# Altium PCB TG21_TX_Ma tran phim.PcbDoc (part 2 of 3)
Units mm, origin at the board's own origin, x right, y up, seen from the top; angles counter-clockwise.
Board outline 300 x 226.6 mm, 2 copper layers (Top Layer, Bottom Layer), stack 1.581 mm thick; 245 components, 229 nets, 914 pads, 4790 vias.
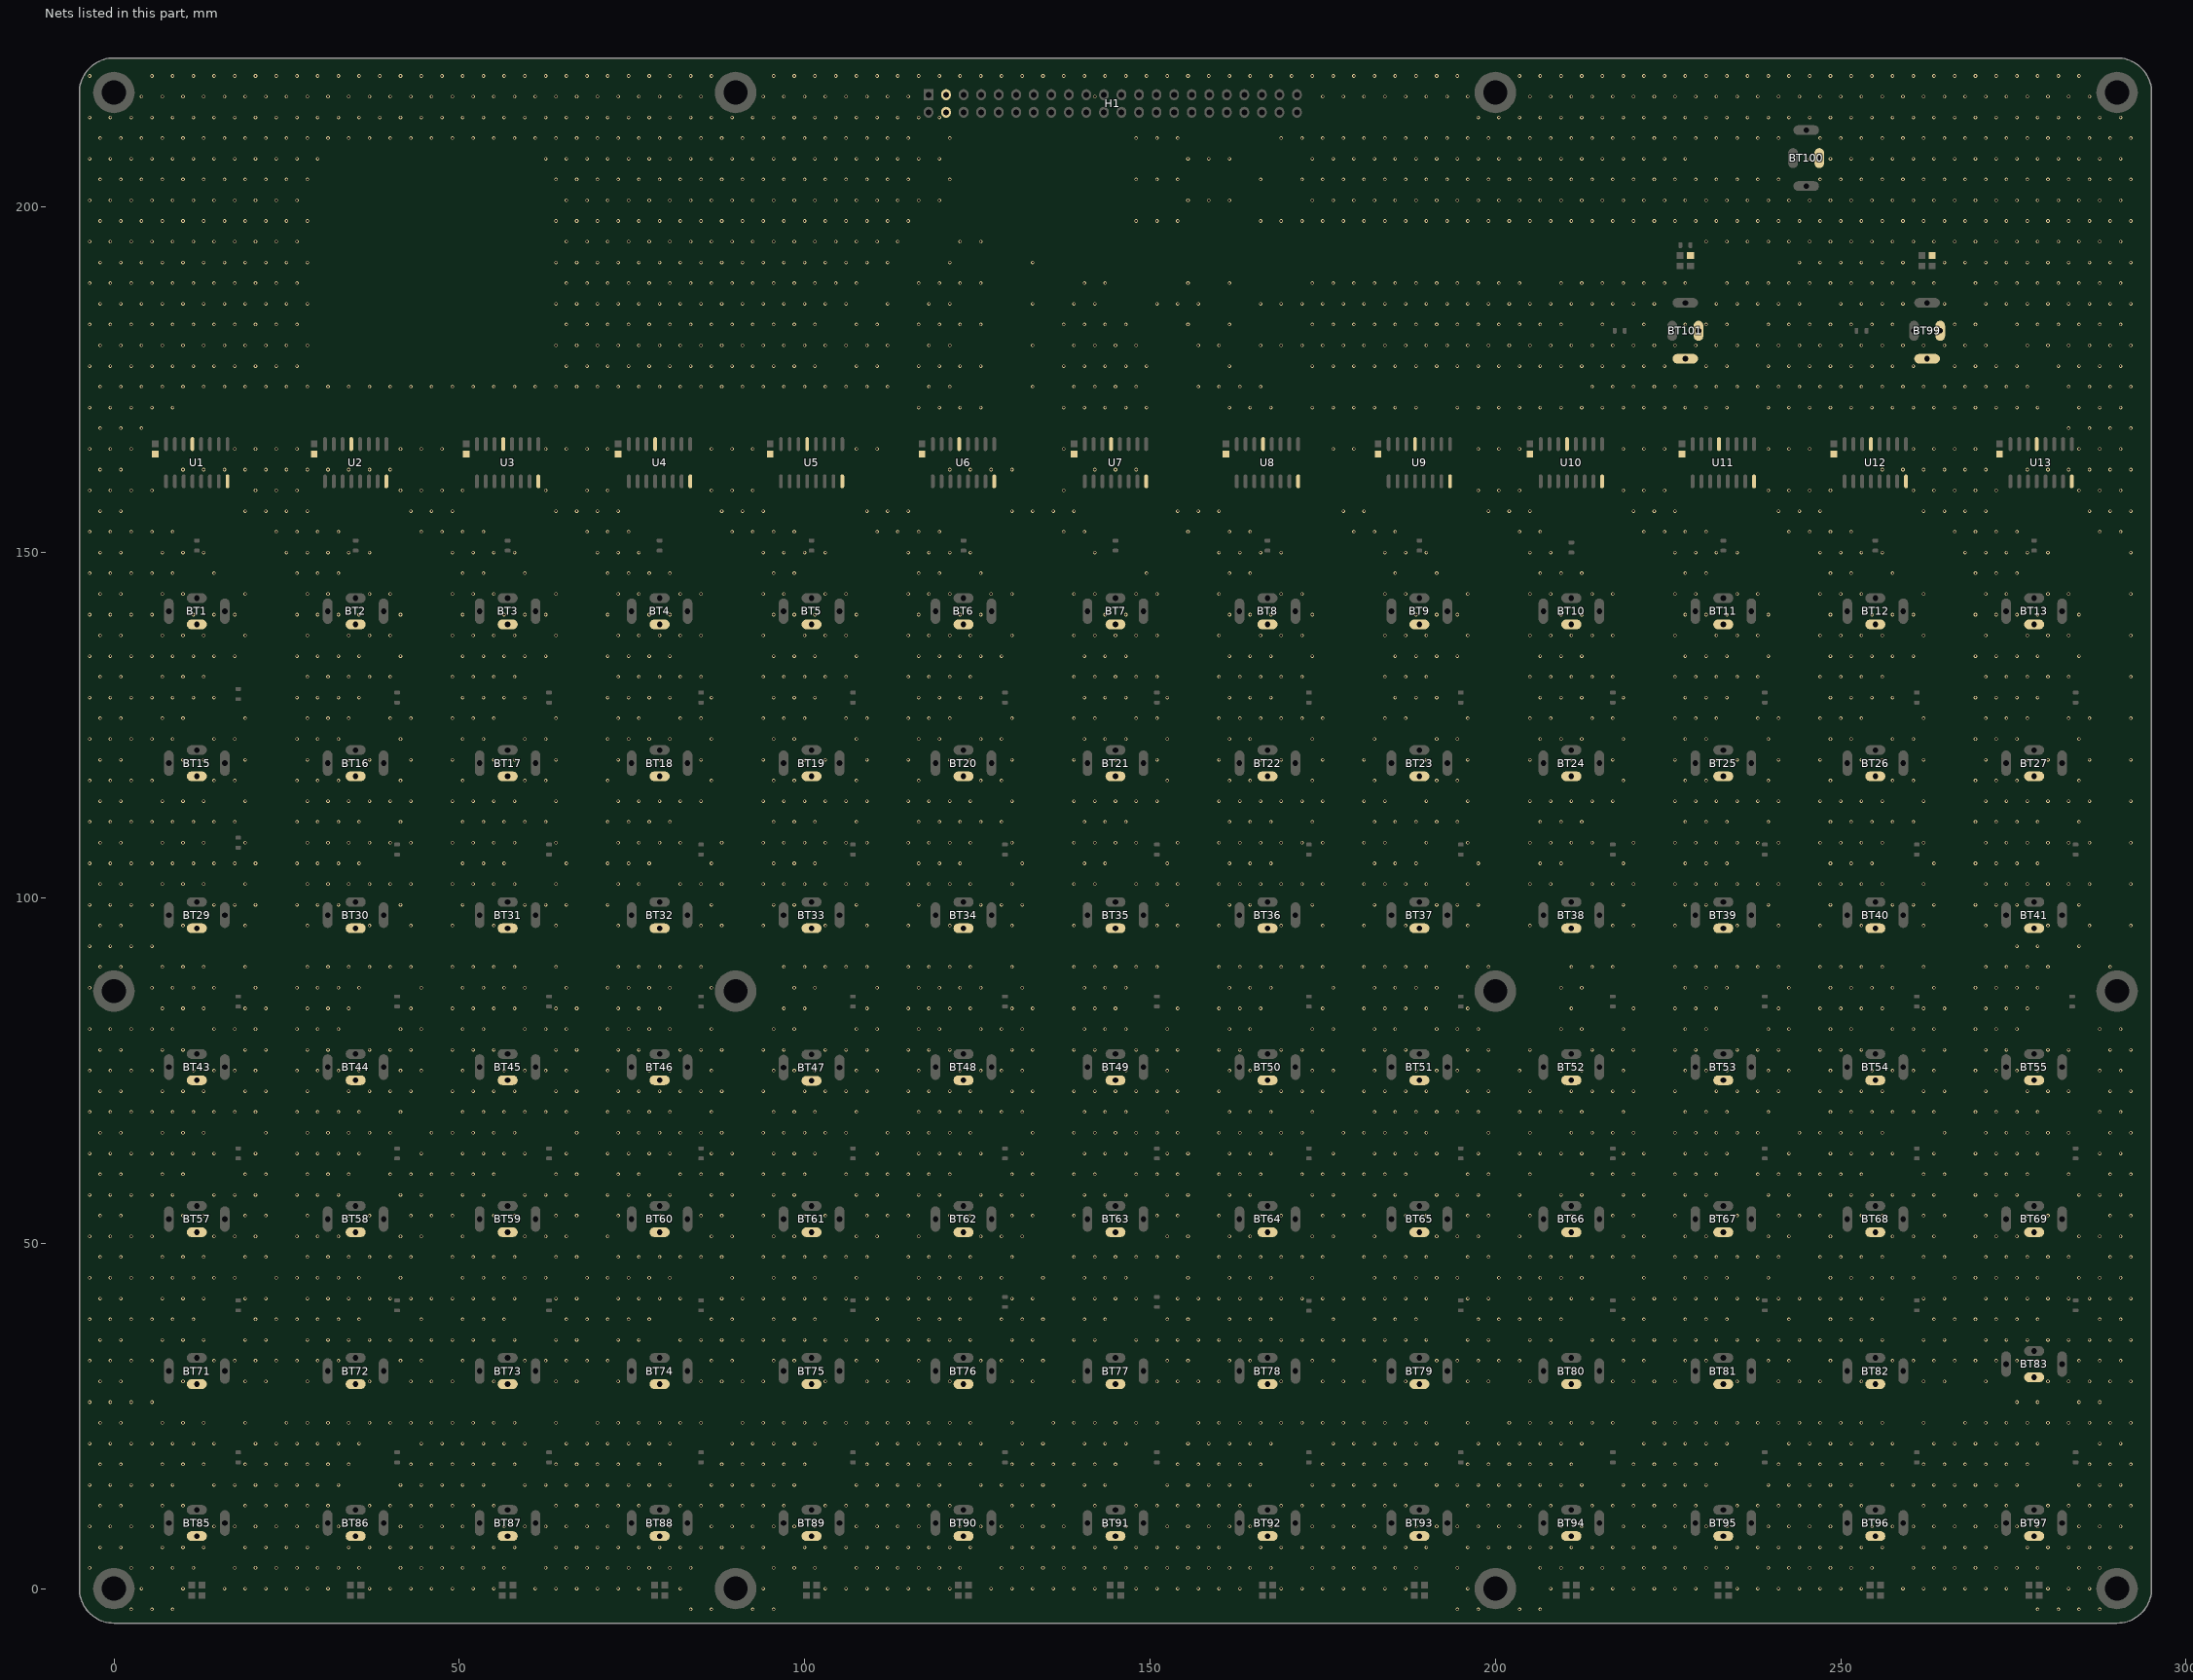
[diagram p2: the nets of this part, all layers, seen from the top]

## Via types
v1: diameter 0.5, hole 0.3, Top Layer to Bottom Layer, tented both sides, 4788 vias
v2: diameter 1.27, hole 0.711, Top Layer to Bottom Layer, tented both sides, 2 vias

## Nets (pads, with @x,y where several pads share a name; then routed paths per layer and width w, separated by ;. In a path a pad name is that pad's centre, name@x,y a point inside that pad or via, vN(x,y) a via of type N, cw(c..) or ccw(c..) an arc to the next point about the centre after c; other vN are vias at no path point) (continued)
GND: BT1.4 BT2.4 BT3.4 BT4.4 BT5.4 BT6.4 BT7.4 BT8.4 BT9.4 BT10.4 BT11.4 BT12.4 BT13.4 BT15.4 BT16.4 BT17.4 BT18.4 BT19.4 BT20.4 BT21.4 BT22.4 BT23.4 BT24.4 BT25.4 BT26.4 BT27.4 BT29.4 BT30.4 BT31.4 BT32.4 BT33.4 BT34.4 BT35.4 BT36.4 BT37.4 BT38.4 BT39.4 BT40.4 BT41.4 BT43.4 BT44.4 BT45.4 BT46.4 BT47.4 BT48.4 BT49.4 BT50.4 BT51.4 BT52.4 BT53.4 BT54.4 BT55.4 BT57.4 BT58.4 BT59.4 BT60.4 BT61.4 BT62.4 BT63.4 BT64.4 BT65.4 BT66.4 BT67.4 BT68.4 BT69.4 BT71.4 BT72.4 BT73.4 BT74.4 BT75.4 BT76.4 BT77.4 BT78.4 BT79.4 BT80.4 BT81.4 BT82.4 BT83.4 BT85.4 BT86.4 BT87.4 BT88.4 BT89.4 BT90.4 BT91.4 BT92.4 BT93.4 BT94.4 BT95.4 BT96.4 BT97.4 BT99.2 BT99.4 BT100.4 BT101.2 BT101.4 C1.1 C2.1 C3.1 C4.1 C5.1 C6.1 C7.1 C8.1 C9.1 C10.1 C11.1 C12.1 C13.1 C29.2 C30.2 H1.3 H1.4 U1.8 U1.13 U2.8 U2.13 U3.8 U3.13 U4.8 U4.13 U5.8 U5.13 U6.8 U6.13 U7.8 U7.13 U8.8 U8.13 U9.8 U9.13 U10.8 U10.13 U11.8 U11.13 U12.8 U12.13 U13.8 U13.13
  other v1: 2.5,-3 5.5,-3 8.5,-3 83.5,-3 86.5,-3 92.5,-3 95.5,-3 194.5,-3 197.5,-3 203.5,-3 206.5,-3 278.5,-3 281.5,-3 284.5,-3 287.5,-3 4,0 10,0 16,0 19,0 22,0 25,0 28,0 31,0 37,0 40,0 43,0 46,0 49,0 52,0 55,0 61,0 64,0 67,0 70,0 73,0 76,0 82,0 94,0 103,0 106,0 109,0 112,0 115,0 118,0 121,0 127,0 130,0 133,0 136,0 139,0 142,0 148,0 151,0 154,0 157,0 160,0 163,0 169,0 172,0 175,0 178,0 181,0 184,0 187,0 196,0 208,0 214,0 217,0 220,0 223,0 226,0 229,0 235,0 238,0 241,0 244,0 247,0 250,0 253,0 259,0 262,0 265,0 268,0 271,0 274,0 280,0 283,0 286,0 -3.5,3 2.5,3 5.5,3 8.5,3 11.5,3 17.5,3 20.5,3 23.5,3 26.5,3 29.5,3 32.5,3 35.5,3 41.5,3 44.5,3 47.5,3 50.5,3 53.5,3 56.5,3 62.5,3 65.5,3 68.5,3 71.5,3 74.5,3 77.5,3 80.5,3 83.5,3 95.5,3 98.5,3 101.5,3 107.5,3 110.5,3 113.5,3 116.5,3 119.5,3 122.5,3 128.5,3 131.5,3 134.5,3 137.5,3 140.5,3 143.5,3 146.5,3 149.5,3 152.5,3 155.5,3 158.5,3 161.5,3 164.5,3 167.5,3 173.5,3 176.5,3 179.5,3 182.5,3 185.5,3 188.5,3 194.5,3 206.5,3 209.5,3 212.5,3 215.5,3 218.5,3 221.5,3 224.5,3 227.5,3 230.5,3 233.5,3 239.5,3 242.5,3 245.5,3 248.5,3 251.5,3 254.5,3 260.5,3 263.5,3 266.5,3 269.5,3 272.5,3 275.5,3 278.5,3 284.5,3 287.5,3 -2,6 1,6 7,6 10,6 13,6 19,6 22,6 25,6 28,6 34,6 37,6 40,6 43,6 46,6 49,6 52,6 55,6 58,6 64,6 67,6 70,6 73,6 76,6 79,6 82,6 85,6 88,6 91,6 94,6 100,6 103,6 106,6 109,6 112,6 115,6 118,6 121,6 124,6 130,6 133,6 136,6 139,6 142,6 145,6 148,6 151,6 154,6 157,6 160,6 166,6 169,6 172,6 175,6 178,6 181,6 184,6 187,6 190,6 196,6 199,6 202,6 205,6 208,6 211,6 214,6 217,6 220,6 223,6 226,6 232,6 235,6 238,6 241,6 244,6 247,6 250,6 253,6 256,6 262,6 265,6 268,6 271,6 277,6 280,6 283,6 286,6 289,6 292,6 -3.5,9 -0.5,9 2.5,9 5.5,9 14.5,9 17.5,9 20.5,9 23.5,9 26.5,9 29.5,9 32.5,9 41.5,9 44.5,9 47.5,9 50.5,9 56.5,9 59.5,9 62.5,9 65.5,9 68.5,9 71.5,9 77.5,9 80.5,9 86.5,9 89.5,9 92.5,9 95.5,9 98.5,9 101.5,9 107.5,9 110.5,9 113.5,9 116.5,9 122.5,9 125.5,9 128.5,9 131.5,9 134.5,9 137.5,9 143.5,9 146.5,9 152.5,9 155.5,9 158.5,9 161.5,9 164.5,9 167.5,9 173.5,9 176.5,9 179.5,9 182.5,9 188.5,9 191.5,9 194.5,9 197.5,9 200.5,9 203.5,9 209.5,9 212.5,9 218.5,9 221.5,9 224.5,9 227.5,9 230.5,9 233.5,9 239.5,9 242.5,9 245.5,9 248.5,9 254.5,9 257.5,9 260.5,9 263.5,9 266.5,9 269.5,9 272.5,9 275.5,9 278.5,9 284.5,9 287.5,9 290.5,9 -2,12 1,12 7,12 10,12 19,12 22,12 25,12 28,12 31,12 37,12 40,12 43,12 46,12 49,12 52,12 55,12 64,12 67,12 70,12 73,12 76,12 82,12 85,12 88,12 91,12 94,12 97,12 103,12 106,12 109,12 112,12 115,12 118,12 121,12 130,12 133,12 136,12 142,12 148,12 151,12 154,12 157,12 160,12 163,12 169,12 172,12 175,12 178,12 181,12 184,12 187,12 196,12 199,12 202,12 205,12 208,12 214,12 217,12 220,12 223,12 226,12 229,12 235,12 238,12 241,12 244,12 247,12 250,12 253,12 262,12 265,12 268,12 271,12 274,12 280,12 283,12 286,12 289,12 292,12 -3.5,15 -0.5,15 2.5,15 5.5,15 8.5,15 14.5,15 17.5,15 20.5,15 23.5,15 26.5,15 29.5,15 32.5,15 41.5,15 44.5,15 47.5,15 50.5,15 53.5,15 59.5,15 62.5,15 65.5,15 68.5,15 71.5,15 74.5,15 77.5,15 80.5,15 86.5,15 89.5,15 92.5,15 95.5,15 98.5,15 107.5,15 110.5,15 113.5,15 116.5,15 119.5,15 125.5,15 128.5,15 131.5,15 134.5,15 140.5,15 143.5,15 152.5,15 155.5,15 158.5,15 161.5,15 164.5,15 173.5,15 176.5,15 179.5,15 182.5,15 185.5,15 191.5,15 194.5,15 197.5,15 200.5,15 203.5,15 206.5,15 209.5,15 212.5,15 218.5,15 221.5,15 224.5,15 227.5,15 230.5,15 239.5,15 242.5,15 245.5,15 248.5,15 251.5,15 257.5,15 260.5,15 263.5,15 266.5,15 269.5,15 272.5,15 275.5,15 284.5,15 287.5,15 290.5,15 -2,18 1,18 7,18 10,18 13,18 19,18 22,18 25,18 28,18 31,18 34,18 43,18 46,18 49,18 52,18 55,18 58,18 64,18 67,18 70,18 73,18 76,18 79,18 88,18 91,18 94,18 97,18 100,18 109,18 112,18 115,18 118,18 121,18 124,18 130,18 133,18 136,18 139,18 142,18 145,18 154,18 157,18 160,18 163,18 166,18 175,18 178,18 181,18 184,18 187,18 190,18 196,18 199,18 202,18 205,18 208,18 211,18 220,18 223,18 226,18 229,18 232,18 241,18 244,18 247,18 250,18 253,18 256,18 262,18 265,18 268,18 271,18 274,18 277,18 286,18 289,18 292,18 -3.5,21 -0.5,21 2.5,21 5.5,21 8.5,21 11.5,21 14.5,21 20.5,21 23.5,21 26.5,21 29.5,21 32.5,21 35.5,21 44.5,21 47.5,21 50.5,21 53.5,21 56.5,21 59.5,21 65.5,21 68.5,21 71.5,21 74.5,21 77.5,21 80.5,21 89.5,21 92.5,21 95.5,21 98.5,21 101.5,21 110.5,21 113.5,21 116.5,21 119.5,21 122.5,21 125.5,21 131.5,21 134.5,21 140.5,21 143.5,21 146.5,21 155.5,21 158.5,21 161.5,21 164.5,21 167.5,21 176.5,21 179.5,21 182.5,21 185.5,21 188.5,21 191.5,21 197.5,21 200.5,21 203.5,21 206.5,21 209.5,21 212.5,21 221.5,21 224.5,21 227.5,21 230.5,21 233.5,21 242.5,21 245.5,21 248.5,21 251.5,21 254.5,21 257.5,21 263.5,21 266.5,21 269.5,21 272.5,21 275.5,21 278.5,21 287.5,21 290.5,21 -2,24 1,24 7,24 10,24 13,24 19,24 25,24 28,24 31,24 34,24 37,24 40,24 43,24 46,24 49,24 52,24 55,24 58,24 64,24 70,24 73,24 76,24 79,24 82,24 85,24 91,24 94,24 97,24 100,24 103,24 106,24 109,24 112,24 115,24 118,24 121,24 124,24 130,24 136,24 139,24 142,24 145,24 148,24 151,24 157,24 160,24 163,24 166,24 169,24 172,24 175,24 178,24 181,24 184,24 187,24 190,24 196,24 202,24 205,24 208,24 211,24 214,24 217,24 223,24 226,24 229,24 232,24 235,24 238,24 241,24 244,24 247,24 250,24 253,24 256,24 262,24 268,24 271,24 274,24 277,24 280,24 283,24 286,24 289,24 292,24 -3.5,27 -0.5,27 2.5,27 5.5,27 275.5,27 278.5,27 284.5,27 287.5,27 -2,30 1,30 10,30 19,30 22,30 28,30 37,30 43,30 46,30 49,30 55,30 64,30 67,30 73,30 85,30 88,30 91,30 94,30 103,30 109,30 112,30 115,30 121,30 130,30 133,30 139,30 151,30 154,30 157,30 160,30 169,30 175,30 178,30 181,30 187,30 196,30 199,30 205,30 217,30 220,30 223,30 226,30 235,30 241,30 244,30 247,30 253,30 262,30 265,30 271,30 280,30 283,30 286,30 289,30 292,30 -3.5,33 -0.5,33 2.5,33 5.5,33 14.5,33 17.5,33 20.5,33 23.5,33 26.5,33 29.5,33 32.5,33 41.5,33 44.5,33 50.5,33 59.5,33 62.5,33 65.5,33 68.5,33 71.5,33 86.5,33 89.5,33 95.5,33 98.5,33 107.5,33 110.5,33 116.5,33 125.5,33 128.5,33 131.5,33 134.5,33 152.5,33 155.5,33 161.5,33 164.5,33 173.5,33 176.5,33 182.5,33 191.5,33 194.5,33 197.5,33 200.5,33 203.5,33 218.5,33 221.5,33 227.5,33 230.5,33 239.5,33 242.5,33 248.5,33 257.5,33 260.5,33 263.5,33 266.5,33 269.5,33 272.5,33 275.5,33 278.5,33 284.5,33 287.5,33 290.5,33 -2,36 1,36 7,36 10,36 13,36 19,36 22,36 28,36 31,36 34,36 37,36 40,36 43,36 46,36 49,36 52,36 55,36 58,36 64,36 67,36 73,36 76,36 82,36 85,36 88,36 91,36 94,36 97,36 100,36 103,36 106,36 109,36 112,36 115,36 118,36 121,36 124,36 130,36 133,36 139,36 142,36 148,36 151,36 154,36 157,36 160,36 163,36 166,36 169,36 172,36 175,36 178,36 181,36 184,36 187,36 190,36 196,36 199,36 205,36 208,36 214,36 217,36 220,36 223,36 226,36 229,36 232,36 235,36 238,36 241,36 244,36 247,36 250,36 253,36 256,36 262,36 265,36 271,36 274,36 277,36 280,36 283,36 286,36 289,36 292,36 -3.5,39 -0.5,39 2.5,39 5.5,39 8.5,39 11.5,39 20.5,39 23.5,39 26.5,39 29.5,39 32.5,39 35.5,39 44.5,39 50.5,39 53.5,39 56.5,39 65.5,39 68.5,39 71.5,39 74.5,39 77.5,39 86.5,39 89.5,39 95.5,39 98.5,39 101.5,39 110.5,39 116.5,39 119.5,39 122.5,39 128.5,39 131.5,39 134.5,39 140.5,39 143.5,39 152.5,39 155.5,39 161.5,39 164.5,39 167.5,39 176.5,39 182.5,39 185.5,39 188.5,39 197.5,39 200.5,39 203.5,39 206.5,39 209.5,39 218.5,39 221.5,39 227.5,39 230.5,39 233.5,39 242.5,39 248.5,39 251.5,39 254.5,39 263.5,39 266.5,39 269.5,39 272.5,39 275.5,39 278.5,39 287.5,39 290.5,39 -2,42 1,42 7,42 10,42 13,42 19,42 22,42 28,42 31,42 34,42 37,42 40,42 43,42 46,42 49,42 52,42 55,42 58,42 64,42 67,42 73,42 76,42 79,42 82,42 88,42 91,42 94,42 97,42 100,42 103,42 106,42 109,42 112,42 115,42 118,42 121,42 124,42 130,42 133,42 139,42 142,42 145,42 148,42 154,42 157,42 160,42 163,42 166,42 169,42 172,42 175,42 178,42 181,42 184,42 187,42 190,42 196,42 199,42 205,42 208,42 211,42 214,42 220,42 223,42 226,42 229,42 232,42 235,42 238,42 241,42 244,42 247,42 250,42 253,42 256,42 262,42 265,42 271,42 274,42 277,42 280,42 283,42 286,42 289,42 292,42 -3.5,45 -0.5,45 2.5,45 5.5,45 8.5,45 11.5,45 14.5,45 17.5,45 23.5,45 26.5,45 29.5,45 32.5,45 35.5,45 41.5,45 50.5,45 53.5,45 56.5,45 59.5,45 62.5,45 68.5,45 71.5,45 74.5,45 77.5,45 80.5,45 89.5,45 95.5,45 98.5,45 101.5,45 107.5,45 116.5,45 119.5,45 122.5,45 125.5,45 128.5,45 134.5,45 140.5,45 143.5,45 146.5,45 155.5,45 161.5,45 164.5,45 167.5,45 173.5,45 182.5,45 185.5,45 188.5,45 191.5,45 194.5,45 200.5,45 203.5,45 206.5,45 209.5,45 212.5,45 221.5,45 227.5,45 230.5,45 233.5,45 239.5,45 248.5,45 251.5,45 254.5,45 257.5,45 260.5,45 266.5,45 269.5,45 272.5,45 275.5,45 278.5,45 284.5,45 287.5,45 290.5,45 -2,48 1,48 7,48 10,48 13,48 19,48 22,48 28,48 31,48 34,48 37,48 40,48 43,48 49,48 52,48 55,48 58,48 64,48 67,48 73,48 76,48 79,48 82,48 85,48 88,48 94,48 97,48 100,48 103,48 106,48 109,48 115,48 118,48 121,48 124,48 130,48 139,48 142,48 145,48 148,48 151,48 154,48 160,48 163,48 166,48 169,48 172,48 175,48 181,48 184,48 187,48 190,48 196,48 199,48 205,48 208,48 211,48 214,48 217,48 220,48 226,48 229,48 232,48 235,48 238,48 241,48 247,48 250,48 253,48 256,48 262,48 265,48 271,48 274,48 277,48 280,48 283,48 289,48 292,48 -3.5,51 -0.5,51 2.5,51 5.5,51 14.5,51 17.5,51 20.5,51 26.5,51 29.5,51 32.5,51 41.5,51 44.5,51 50.5,51 59.5,51 62.5,51 65.5,51 71.5,51 86.5,51 89.5,51 95.5,51 98.5,51 107.5,51 110.5,51 116.5,51 125.5,51 128.5,51 131.5,51 152.5,51 155.5,51 161.5,51 164.5,51 173.5,51 176.5,51 182.5,51 191.5,51 194.5,51 197.5,51 203.5,51 218.5,51 221.5,51 227.5,51 230.5,51 239.5,51 242.5,51 248.5,51 257.5,51 260.5,51 263.5,51 269.5,51 272.5,51 275.5,51 284.5,51 287.5,51 290.5,51 -2,54 1,54 10,54 13,54 19,54 22,54 28,54 34,54 37,54 43,54 46,54 49,54 55,54 58,54 64,54 67,54 73,54 79,54 85,54 88,54 94,54 100,54 103,54 109,54 112,54 115,54 121,54 124,54 130,54 133,54 139,54 145,54 151,54 154,54 160,54 166,54 169,54 175,54 178,54 181,54 187,54 190,54 196,54 199,54 205,54 211,54 217,54 220,54 226,54 232,54 235,54 241,54 244,54 247,54 253,54 256,54 262,54 265,54 271,54 277,54 280,54 289,54 292,54 -3.5,57 -0.5,57 2.5,57 5.5,57 8.5,57 14.5,57 17.5,57 20.5,57 26.5,57 29.5,57 32.5,57 41.5,57 44.5,57 50.5,57 53.5,57 59.5,57 62.5,57 65.5,57 71.5,57 74.5,57 77.5,57 80.5,57 86.5,57 89.5,57 95.5,57 98.5,57 107.5,57 110.5,57 116.5,57 119.5,57 125.5,57 128.5,57 131.5,57 140.5,57 143.5,57 146.5,57 152.5,57 155.5,57 161.5,57 164.5,57 173.5,57 176.5,57 182.5,57 185.5,57 191.5,57 194.5,57 197.5,57 203.5,57 209.5,57 212.5,57 218.5,57 221.5,57 227.5,57 230.5,57 239.5,57 242.5,57 248.5,57 251.5,57 254.5,57 257.5,57 260.5,57 263.5,57 269.5,57 272.5,57 275.5,57 284.5,57 287.5,57 290.5,57 -2,60 1,60 7,60 10,60 19,60 22,60 28,60 31,60 34,60 40,60 43,60 46,60 49,60 52,60 55,60 64,60 67,60 73,60 76,60 82,60 85,60 88,60 94,60 97,60 100,60 106,60 109,60 112,60 115,60 118,60 121,60 130,60 133,60 139,60 142,60 148,60 151,60 154,60 160,60 163,60 166,60 172,60 175,60 178,60 181,60 184,60 187,60 196,60 199,60 205,60 214,60 217,60 220,60 226,60 229,60 232,60 238,60 241,60 244,60 247,60 250,60 253,60 262,60 265,60 271,60 274,60 277,60 283,60 289,60 292,60 -3.5,63 -0.5,63 2.5,63 5.5,63 8.5,63 11.5,63 14.5,63 20.5,63 26.5,63 29.5,63 32.5,63 35.5,63 44.5,63 50.5,63 53.5,63 56.5,63 59.5,63 65.5,63 71.5,63 74.5,63 77.5,63 80.5,63 86.5,63 89.5,63 95.5,63 98.5,63 101.5,63 110.5,63 116.5,63 119.5,63 122.5,63 125.5,63 131.5,63 140.5,63 143.5,63 146.5,63 152.5,63 155.5,63 161.5,63 164.5,63 167.5,63 176.5,63 182.5,63 185.5,63 188.5,63 191.5,63 197.5,63 203.5,63 206.5,63 209.5,63 212.5,63 218.5,63 221.5,63 227.5,63 230.5,63 233.5,63 242.5,63 248.5,63 251.5,63 254.5,63 257.5,63 263.5,63 269.5,63 272.5,63 275.5,63 278.5,63 287.5,63 290.5,63 -2,66 1,66 7,66 10,66 13,66 22,66 28,66 31,66 34,66 37,66 40,66 46,66 49,66 52,66 55,66 58,66 67,66 73,66 76,66 79,66 82,66 85,66 88,66 94,66 97,66 100,66 103,66 106,66 112,66 115,66 118,66 121,66 124,66 133,66 139,66 142,66 145,66 148,66 151,66 154,66 160,66 163,66 166,66 169,66 172,66 178,66 181,66 184,66 187,66 190,66 199,66 205,66 211,66 214,66 217,66 220,66 226,66 229,66 232,66 235,66 238,66 244,66 247,66 250,66 253,66 256,66 265,66 271,66 274,66 277,66 280,66 283,66 289,66 292,66 -3.5,69 -0.5,69 2.5,69 5.5,69 8.5,69 11.5,69 14.5,69 17.5,69 20.5,69 26.5,69 29.5,69 32.5,69 35.5,69 41.5,69 50.5,69 53.5,69 56.5,69 59.5,69 62.5,69 65.5,69 71.5,69 74.5,69 77.5,69 80.5,69 86.5,69 95.5,69 98.5,69 101.5,69 107.5,69 116.5,69 119.5,69 122.5,69 125.5,69 128.5,69 131.5,69 140.5,69 143.5,69 146.5,69 152.5,69 161.5,69 164.5,69 167.5,69 173.5,69 182.5,69 185.5,69 188.5,69 191.5,69 194.5,69 197.5,69 203.5,69 206.5,69 209.5,69 212.5,69 218.5,69 227.5,69 230.5,69 233.5,69 239.5,69 248.5,69 251.5,69 254.5,69 257.5,69 260.5,69 263.5,69 269.5,69 272.5,69 275.5,69 278.5,69 287.5,69 290.5,69 -2,72 1,72 7,72 10,72 13,72 19,72 22,72 28,72 34,72 37,72 40,72 43,72 49,72 52,72 55,72 58,72 64,72 67,72 73,72 76,72 79,72 82,72 85,72 88,72 94,72 100,72 103,72 106,72 109,72 115,72 118,72 121,72 124,72 130,72 133,72 139,72 142,72 145,72 148,72 151,72 154,72 160,72 166,72 169,72 172,72 175,72 181,72 184,72 187,72 190,72 196,72 199,72 205,72 211,72 214,72 217,72 220,72 226,72 232,72 235,72 238,72 241,72 247,72 250,72 253,72 256,72 262,72 265,72 271,72 277,72 280,72 283,72 289,72 292,72 -3.5,75 -0.5,75 2.5,75 5.5,75 11.5,75 14.5,75 17.5,75 20.5,75 26.5,75 29.5,75 32.5,75 35.5,75 41.5,75 44.5,75 50.5,75 56.5,75 59.5,75 62.5,75 65.5,75 71.5,75 77.5,75 80.5,75 86.5,75 95.5,75 98.5,75 101.5,75 107.5,75 110.5,75 116.5,75 122.5,75 125.5,75 128.5,75 131.5,75 143.5,75 146.5,75 152.5,75 161.5,75 164.5,75 167.5,75 173.5,75 176.5,75 182.5,75 188.5,75 191.5,75 194.5,75 197.5,75 203.5,75 209.5,75 212.5,75 218.5,75 227.5,75 230.5,75 233.5,75 239.5,75 242.5,75 248.5,75 254.5,75 257.5,75 260.5,75 263.5,75 269.5,75 272.5,75 275.5,75 278.5,75 287.5,75 290.5,75 -2,78 1,78 7,78 10,78 19,78 22,78 28,78 31,78 37,78 40,78 43,78 49,78 52,78 55,78 64,78 67,78 73,78 76,78 82,78 85,78 88,78 94,78 97,78 103,78 106,78 109,78 115,78 118,78 121,78 130,78 133,78 139,78 142,78 148,78 151,78 154,78 160,78 163,78 169,78 172,78 175,78 181,78 184,78 187,78 196,78 199,78 205,78 214,78 217,78 220,78 226,78 229,78 235,78 238,78 241,78 247,78 250,78 253,78 262,78 265,78 271,78 274,78 280,78 283,78 289,78 292,78 -3.5,81 -0.5,81 2.5,81 5.5,81 8.5,81 14.5,81 17.5,81 20.5,81 26.5,81 29.5,81 32.5,81 41.5,81 44.5,81 50.5,81 53.5,81 59.5,81 62.5,81 65.5,81 71.5,81 74.5,81 77.5,81 80.5,81 86.5,81 95.5,81 98.5,81 107.5,81 110.5,81 116.5,81 119.5,81 125.5,81 128.5,81 131.5,81 140.5,81 143.5,81 146.5,81 152.5,81 161.5,81 164.5,81 173.5,81 176.5,81 182.5,81 185.5,81 191.5,81 194.5,81 197.5,81 209.5,81 212.5,81 218.5,81 227.5,81 230.5,81 239.5,81 242.5,81 248.5,81 251.5,81 257.5,81 260.5,81 263.5,81 269.5,81 272.5,81 275.5,81 287.5,81 290.5,81 7,84 10,84 13,84 19,84 22,84 28,84 31,84 34,84 43,84 49,84 52,84 55,84 58,84 64,84 67,84 73,84 76,84 79,84 97,84 100,84 109,84 115,84 118,84 121,84 124,84 130,84 133,84 139,84 142,84 145,84 154,84 160,84 163,84 166,84 175,84 181,84 184,84 187,84 190,84 196,84 211,84 220,84 226,84 229,84 232,84 241,84 247,84 250,84 253,84 256,84 262,84 265,84 271,84 274,84 277,84 -3.5,87 5.5,87 8.5,87 11.5,87 14.5,87 20.5,87 26.5,87 29.5,87 32.5,87 35.5,87 44.5,87 50.5,87 53.5,87 56.5,87 59.5,87 65.5,87 71.5,87 74.5,87 77.5,87 80.5,87 86.5,87 98.5,87 101.5,87 110.5,87 116.5,87 119.5,87 122.5,87 125.5,87 131.5,87 140.5,87 143.5,87 146.5,87 161.5,87 164.5,87 167.5,87 176.5,87 182.5,87 185.5,87 188.5,87 191.5,87 209.5,87 212.5,87 227.5,87 230.5,87 233.5,87 242.5,87 248.5,87 251.5,87 254.5,87 257.5,87 263.5,87 269.5,87 272.5,87 275.5,87 278.5,87 -2,90 1,90 7,90 10,90 13,90 19,90 28,90 31,90 34,90 37,90 40,90 43,90 49,90 52,90 55,90 58,90 64,90 73,90 76,90 79,90 82,90 85,90 97,90 100,90 103,90 106,90 109,90 115,90 118,90 121,90 124,90 130,90 139,90 142,90 145,90 148,90 151,90 160,90 163,90 166,90 169,90 172,90 175,90 181,90 184,90 187,90 190,90 196,90 199,90 211,90 214,90 217,90 226,90 229,90 232,90 235,90 238,90 241,90 247,90 250,90 253,90 256,90 262,90 271,90 274,90 277,90 280,90 289,90 -3.5,93 -0.5,93 2.5,93 5.5,93 275.5,93 278.5,93 284.5,93 -2,96 1,96 10,96 19,96 28,96 37,96 43,96 49,96 55,96 64,96 73,96 85,96 88,96 94,96 103,96 109,96 115,96 121,96 130,96 139,96 151,96 154,96 160,96 169,96 175,96 181,96 187,96 196,96 205,96 217,96 220,96 226,96 235,96 241,96 247,96 253,96 262,96 271,96 280,96 286,96 292,96 -3.5,99 -0.5,99 2.5,99 5.5,99 14.5,99 17.5,99 20.5,99 26.5,99 29.5,99 32.5,99 41.5,99 50.5,99 59.5,99 62.5,99 65.5,99 71.5,99 86.5,99 95.5,99 98.5,99 107.5,99 116.5,99 125.5,99 128.5,99 131.5,99 152.5,99 161.5,99 164.5,99 173.5,99 182.5,99 191.5,99 194.5,99 197.5,99 218.5,99 227.5,99 230.5,99 239.5,99 248.5,99 257.5,99 260.5,99 263.5,99 269.5,99 272.5,99 275.5,99 284.5,99 -2,102 1,102 7,102 10,102 13,102 19,102 28,102 31,102 34,102 37,102 40,102 43,102 49,102 52,102 55,102 58,102 64,102 73,102 76,102 82,102 85,102 88,102 94,102 97,102 100,102 103,102 106,102 109,102 115,102 118,102 121,102 124,102 130,102 139,102 142,102 148,102 151,102 154,102 160,102 163,102 166,102 169,102 172,102 175,102 181,102 184,102 187,102 190,102 196,102 205,102 208,102 214,102 217,102 220,102 226,102 229,102 232,102 235,102 238,102 241,102 247,102 250,102 253,102 256,102 262,102 271,102 274,102 277,102 280,102 283,102 286,102 292,102 -3.5,105 -0.5,105 2.5,105 5.5,105 8.5,105 11.5,105 14.5,105 17.5,105 20.5,105 26.5,105 29.5,105 32.5,105 35.5,105 50.5,105 53.5,105 56.5,105 65.5,105 71.5,105 74.5,105 77.5,105 86.5,105 95.5,105 98.5,105 101.5,105 116.5,105 119.5,105 122.5,105 131.5,105 140.5,105 143.5,105 152.5,105 161.5,105 164.5,105 167.5,105 182.5,105 185.5,105 188.5,105 197.5,105 206.5,105 209.5,105 218.5,105 227.5,105 230.5,105 233.5,105 248.5,105 251.5,105 254.5,105 263.5,105 269.5,105 272.5,105 275.5,105 278.5,105 -2,108 1,108 7,108 10,108 13,108 19,108 28,108 31,108 34,108 37,108 40,108 43,108 49,108 52,108 55,108 58,108 64,108 73,108 76,108 79,108 82,108 88,108 94,108 97,108 100,108 103,108 106,108 109,108 115,108 118,108 121,108 124,108 130,108 139,108 142,108 145,108 148,108 154,108 160,108 163,108 166,108 169,108 172,108 175,108 181,108 184,108 190,108 196,108 205,108 208,108 211,108 214,108 220,108 226,108 229,108 232,108 235,108 238,108 241,108 247,108 250,108 253,108 256,108 262,108 271,108 274,108 277,108 280,108 283,108 286,108 292,108 -3.5,111 -0.5,111 2.5,111 5.5,111 8.5,111 11.5,111 14.5,111 17.5,111 26.5,111 29.5,111 32.5,111 35.5,111 41.5,111 50.5,111 53.5,111 56.5,111 59.5,111 62.5,111 71.5,111 74.5,111 77.5,111 80.5,111 95.5,111 98.5,111 101.5,111 107.5,111 116.5,111 119.5,111 122.5,111 125.5,111 128.5,111 140.5,111 143.5,111 146.5,111 161.5,111 164.5,111 167.5,111 173.5,111 182.5,111 185.5,111 188.5,111 191.5,111 194.5,111 206.5,111 209.5,111 212.5,111 227.5,111 230.5,111 233.5,111 239.5,111 248.5,111 251.5,111 254.5,111 257.5,111 260.5,111 269.5,111 272.5,111 275.5,111 278.5,111 284.5,111 -2,114 1,114 7,114 10,114 13,114 19,114 28,114 31,114 34,114 37,114 40,114 43,114 49,114 52,114 55,114 58,114 64,114 73,114 76,114 79,114 82,114 85,114 94,114 97,114 100,114 103,114 106,114 109,114 115,114 118,114 121,114 124,114 130,114 139,114 142,114 145,114 148,114 151,114 160,114 163,114 166,114 169,114 172,114 175,114 181,114 184,114 190,114 196,114 205,114 208,114 211,114 214,114 217,114 226,114 229,114 232,114 235,114 238,114 241,114 247,114 250,114 253,114 256,114 262,114 271,114 274,114 277,114 280,114 283,114 286,114 292,114 -3.5,117 -0.5,117 2.5,117 5.5,117 14.5,117 17.5,117 26.5,117 29.5,117 32.5,117 41.5,117 50.5,117 59.5,117 62.5,117 71.5,117 86.5,117 95.5,117 98.5,117 107.5,117 116.5,117 125.5,117 128.5,117 152.5,117 161.5,117 164.5,117 173.5,117 182.5,117 191.5,117 194.5,117 218.5,117 227.5,117 230.5,117 239.5,117 248.5,117 257.5,117 260.5,117 269.5,117 272.5,117 275.5,117 284.5,117 -2,120 1,120 10,120 13,120 19,120 28,120 34,120 37,120 43,120 49,120 55,120 58,120 64,120 73,120 79,120 85,120 94,120 100,120 103,120 109,120 115,120 121,120 124,120 130,120 139,120 145,120 151,120 160,120 166,120 169,120 175,120 181,120 190,120 196,120 205,120 211,120 217,120 226,120 232,120 235,120 241,120 247,120 253,120 256,120 262,120 271,120 277,120 280,120 286,120 292,120 -3.5,123 -0.5,123 2.5,123 5.5,123 8.5,123 14.5,123 17.5,123 26.5,123 29.5,123 32.5,123 41.5,123 50.5,123 53.5,123 59.5,123 62.5,123 71.5,123 74.5,123 77.5,123 80.5,123 86.5,123 95.5,123 98.5,123 107.5,123 116.5,123 119.5,123 125.5,123 128.5,123 140.5,123 143.5,123 146.5,123 152.5,123 161.5,123 164.5,123 173.5,123 182.5,123 191.5,123 194.5,123 206.5,123 209.5,123 212.5,123 218.5,123 227.5,123 230.5,123 239.5,123 248.5,123 251.5,123 257.5,123 260.5,123 269.5,123 272.5,123 275.5,123 284.5,123 -2,126 1,126 7,126 10,126 19,126 28,126 31,126 34,126 40,126 43,126 49,126 52,126 55,126 64,126 73,126 76,126 82,126 85,126 94,126 97,126 100,126 106,126 109,126 115,126 118,126 121,126 130,126 139,126 142,126 148,126 151,126 160,126 163,126 166,126 169,126 172,126 175,126 184,126 187,126 196,126 205,126 208,126 214,126 217,126 226,126 229,126 232,126 238,126 241,126 247,126 250,126 253,126 262,126 271,126 274,126 277,126 283,126 286,126 292,126 -3.5,129 -0.5,129 2.5,129 5.5,129 8.5,129 11.5,129 14.5,129 26.5,129 29.5,129 32.5,129 35.5,129 50.5,129 53.5,129 56.5,129 59.5,129 71.5,129 74.5,129 77.5,129 80.5,129 86.5,129 95.5,129 98.5,129 101.5,129 116.5,129 119.5,129 122.5,129 125.5,129 140.5,129 143.5,129 146.5,129 152.5,129 161.5,129 164.5,129 167.5,129 185.5,129 188.5,129 191.5,129 206.5,129 209.5,129 212.5,129 218.5,129 227.5,129 230.5,129 233.5,129 248.5,129 251.5,129 254.5,129 257.5,129 269.5,129 272.5,129 275.5,129 278.5,129 -2,132 1,132 7,132 10,132 13,132 28,132 31,132 34,132 37,132 40,132 49,132 52,132 55,132 58,132 73,132 76,132 79,132 82,132 85,132 94,132 97,132 100,132 103,132 106,132 115,132 118,132 121,132 124,132 139,132 142,132 145,132 148,132 151,132 160,132 163,132 166,132 169,132 172,132 184,132 187,132 190,132 205,132 208,132 211,132 214,132 217,132 226,132 229,132 232,132 235,132 238,132 247,132 250,132 253,132 256,132 271,132 274,132 277,132 280,132 283,132 292,132 -3.5,135 -0.5,135 2.5,135 5.5,135 8.5,135 11.5,135 14.5,135 17.5,135 26.5,135 29.5,135 32.5,135 35.5,135 41.5,135 50.5,135 53.5,135 56.5,135 59.5,135 62.5,135 71.5,135 74.5,135 77.5,135 80.5,135 95.5,135 98.5,135 101.5,135 107.5,135 116.5,135 119.5,135 122.5,135 125.5,135 128.5,135 140.5,135 143.5,135 146.5,135 161.5,135 164.5,135 167.5,135 173.5,135 185.5,135 188.5,135 191.5,135 194.5,135 206.5,135 209.5,135 212.5,135 227.5,135 230.5,135 233.5,135 239.5,135 248.5,135 251.5,135 254.5,135 257.5,135 260.5,135 269.5,135 272.5,135 275.5,135 278.5,135 284.5,135 -2,138 1,138 7,138 10,138 13,138 19,138 28,138 34,138 37,138 40,138 49,138 52,138 55,138 58,138 64,138 73,138 76,138 79,138 82,138 85,138 94,138 100,138 103,138 106,138 115,138 118,138 121,138 124,138 130,138 139,138 142,138 145,138 148,138 151,138 160,138 166,138 169,138 172,138 184,138 187,138 190,138 196,138 205,138 208,138 211,138 214,138 217,138 226,138 232,138 235,138 238,138 247,138 250,138 253,138 256,138 262,138 271,138 277,138 280,138 283,138 292,138 -3.5,141 -0.5,141 2.5,141 5.5,141 11.5,141 14.5,141 17.5,141 26.5,141 29.5,141 32.5,141 35.5,141 41.5,141 50.5,141 56.5,141 59.5,141 62.5,141 71.5,141 77.5,141 80.5,141 95.5,141 98.5,141 101.5,141 107.5,141 116.5,141 122.5,141 125.5,141 143.5,141 146.5,141 161.5,141 164.5,141 167.5,141 173.5,141 188.5,141 191.5,141 194.5,141 209.5,141 212.5,141 227.5,141 230.5,141 233.5,141 239.5,141 248.5,141 254.5,141 257.5,141 260.5,141 269.5,141 272.5,141 275.5,141 278.5,141 284.5,141 -2,144 1,144 7,144 10,144 19,144 28,144 31,144 37,144 40,144 49,144 52,144 55,144 64,144 73,144 76,144 82,144 85,144 94,144 97,144 103,144 106,144 115,144 118,144 121,144 127,144 130,144 139,144 142,144 148,144 151,144 160,144 169,144 172,144 184,144 187,144 196,144 205,144 208,144 214,144 217,144 226,144 229,144 235,144 238,144 247,144 250,144 253,144 262,144 271,144 274,144 280,144 283,144 292,144 -3.5,147 -0.5,147 2.5,147 5.5,147 8.5,147 14.5,147 26.5,147 29.5,147 32.5,147 50.5,147 53.5,147 59.5,147 71.5,147 74.5,147 77.5,147 80.5,147 95.5,147 98.5,147 116.5,147 119.5,147 125.5,147 149.5,147 161.5,147 164.5,147 185.5,147 191.5,147 206.5,147 209.5,147 212.5,147 227.5,147 230.5,147 248.5,147 251.5,147 257.5,147 269.5,147 272.5,147 275.5,147 -2,150 1,150 7,150 10,150 13,150 25,150 28,150 31,150 34,150 37,150 49,150 52,150 55,150 58,150 70,150 73,150 76,150 94,150 97,150 100,150 103,150 115,150 118,150 121,150 124,150 142,150 160,150 163,150 166,150 169,150 184,150 187,150 190,150 205,150 208,150 226,150 229,150 232,150 235,150 247,150 250,150 253,150 256,150 268,150 271,150 274,150 277,150 280,150 292,150 -3.5,153 -0.5,153 2.5,153 5.5,153 8.5,153 23.5,153 26.5,153 29.5,153 32.5,153 44.5,153 47.5,153 50.5,153 53.5,153 68.5,153 71.5,153 74.5,153 89.5,153 92.5,153 95.5,153 98.5,153 110.5,153 113.5,153 116.5,153 119.5,153 137.5,153 140.5,153 155.5,153 161.5,153 164.5,153 179.5,153 182.5,153 185.5,153 203.5,153 206.5,153 221.5,153 224.5,153 227.5,153 230.5,153 242.5,153 245.5,153 248.5,153 251.5,153 266.5,153 269.5,153 272.5,153 275.5,153 287.5,153 290.5,153 -2,156 1,156 19,156 22,156 25,156 28,156 43,156 46,156 49,156 64,156 67,156 70,156 73,156 88,156 91,156 94,156 109,156 112,156 115,156 130,156 133,156 136,156 139,156 154,156 157,156 160,156 178,156 181,156 199,156 202,156 205,156 220,156 223,156 226,156 241,156 244,156 247,156 262,156 265,156 268,156 271,156 286,156 289,156 292,156 -3.5,159 -0.5,159 2.5,159 5.5,159 20.5,159 23.5,159 26.5,159 41.5,159 44.5,159 47.5,159 50.5,159 62.5,159 68.5,159 71.5,159 86.5,159 89.5,159 92.5,159 137.5,159 197.5,159 200.5,159 203.5,159 218.5,159 221.5,159 224.5,159 239.5,159 242.5,159 245.5,159 248.5,159 260.5,159 263.5,159 266.5,159 269.5,159 272.5,159 284.5,159 287.5,159 290.5,159 -2,162 1,162 10,162 13,162 16,162 19,162 22,162 25,162 28,162 31,162 34,162 37,162 40,162 121,162 124,162 127,162 130,162 142,162 145,162 148,162 256,162 259,162 262,162 265,162 268,162 271,162 277,162 280,162 283,162 286,162 289,162 292,162 -3.5,165 -0.5,165 2.5,165 17.5,165 20.5,165 23.5,165 26.5,165 41.5,165 44.5,165 47.5,165 62.5,165 65.5,165 68.5,165 71.5,165 86.5,165 89.5,165 92.5,165 107.5,165 110.5,165 137.5,165 176.5,165 179.5,165 197.5,165 200.5,165 203.5,165 218.5,165 221.5,165 224.5,165 239.5,165 242.5,165 245.5,165 260.5,165 263.5,165 266.5,165 269.5,165 284.5,165 287.5,165 290.5,165 -2,168 1,168 4,168 283,168 286,168 289,168 292,168 -3.5,171 -0.5,171 2.5,171 5.5,171 8.5,171 116.5,171 119.5,171 122.5,171 125.5,171 137.5,171 140.5,171 143.5,171 146.5,171 149.5,171 161.5,171 164.5,171 167.5,171 173.5,171 176.5,171 179.5,171 182.5,171 185.5,171 188.5,171 194.5,171 197.5,171 200.5,171 203.5,171 206.5,171 209.5,171 212.5,171 215.5,171 218.5,171 221.5,171 224.5,171 227.5,171 230.5,171 233.5,171 239.5,171 242.5,171 245.5,171 248.5,171 251.5,171 254.5,171 257.5,171 260.5,171 263.5,171 266.5,171 269.5,171 272.5,171 275.5,171 278.5,171 284.5,171 287.5,171 290.5,171 -2,174 1,174 4,174 7,174 10,174 13,174 16,174 19,174 22,174 25,174 28,174 31,174 34,174 37,174 40,174 43,174 46,174 49,174 52,174 55,174 58,174 61,174 64,174 67,174 70,174 73,174 76,174 79,174 82,174 85,174 88,174 91,174 94,174 97,174 100,174 103,174 106,174 109,174 112,174 118,174 121,174 133,174 139,174 142,174 145,174 148,174 157,174 160,174 163,174 166,174 214,174 217,174 220,174 223,174 226,174 229,174 232,174 235,174 238,174 241,174 244,174 247,174 250,174 253,174 256,174 259,174 262,174 265,174 268,174 271,174 274,174 277,174 283,174 286,174 289,174 292,174 -3.5,177 -0.5,177 2.5,177 5.5,177 8.5,177 11.5,177 14.5,177 17.5,177 20.5,177 23.5,177 26.5,177 65.5,177 68.5,177 71.5,177 74.5,177 77.5,177 80.5,177 83.5,177 86.5,177 89.5,177 92.5,177 95.5,177 98.5,177 101.5,177 107.5,177 110.5,177 116.5,177 119.5,177 122.5,177 125.5,177 137.5,177 140.5,177 143.5,177 146.5,177 149.5,177 161.5,177 173.5,177 176.5,177 179.5,177 182.5,177 185.5,177 188.5,177 191.5,177 194.5,177 197.5,177 200.5,177 203.5,177 206.5,177 209.5,177 212.5,177 215.5,177 218.5,177 221.5,177 224.5,177 230.5,177 233.5,177 239.5,177 242.5,177 245.5,177 248.5,177 251.5,177 254.5,177 257.5,177 260.5,177 266.5,177 269.5,177 272.5,177 275.5,177 281.5,177 284.5,177 287.5,177 290.5,177 -2,180 1,180 4,180 7,180 10,180 13,180 16,180 19,180 22,180 25,180 28,180 64,180 67,180 70,180 73,180 76,180 79,180 82,180 85,180 88,180 91,180 94,180 97,180 100,180 103,180 106,180 109,180 112,180 118,180 121,180 133,180 139,180 142,180 145,180 148,180 157,180 160,180 166,180 169,180 172,180 175,180 178,180 181,180 184,180 187,180 190,180 193,180 196,180 199,180 202,180 205,180 208,180 211,180 214,180 217,180 220,180 223,180 226,180 229,180 232,180 235,180 238,180 241,180 244,180 247,180 250,180 253,180 256,180 259,180 262,180 265,180 268,180 271,180 277,180 280,180 283,180 286,180 289,180 292,180 -3.5,183 -0.5,183 2.5,183 5.5,183 8.5,183 11.5,183 14.5,183 17.5,183 20.5,183 23.5,183 26.5,183 65.5,183 68.5,183 71.5,183 74.5,183 77.5,183 80.5,183 83.5,183 86.5,183 89.5,183 92.5,183 95.5,183 98.5,183 101.5,183 107.5,183 110.5,183 116.5,183 119.5,183 122.5,183 125.5,183 137.5,183 140.5,183 143.5,183 146.5,183 155.5,183 161.5,183 173.5,183 176.5,183 179.5,183 182.5,183 185.5,183 188.5,183 191.5,183 194.5,183 197.5,183 200.5,183 203.5,183 206.5,183 209.5,183 215.5,183 221.5,183 227.5,183 230.5,183 233.5,183 239.5,183 242.5,183 245.5,183 248.5,183 251.5,183 254.5,183 257.5,183 266.5,183 269.5,183 275.5,183 278.5,183 281.5,183 284.5,183 287.5,183 290.5,183 -2,186 1,186 4,186 7,186 10,186 13,186 16,186 19,186 22,186 25,186 28,186 64,186 67,186 70,186 73,186 76,186 79,186 82,186 85,186 88,186 91,186 94,186 97,186 100,186 103,186 106,186 112,186 118,186 121,186 133,186 139,186 142,186 151,186 154,186 157,186 166,186 169,186 172,186 175,186 178,186 181,186 184,186 187,186 190,186 193,186 196,186 199,186 202,186 205,186 208,186 211,186 214,186 217,186 220,186 223,186 232,186 235,186 238,186 241,186 244,186 250,186 253,186 256,186 259,186 265,186 271,186 274,186 277,186 280,186 283,186 286,186 289,186 292,186 -3.5,189 -0.5,189 2.5,189 5.5,189 8.5,189 11.5,189 14.5,189 17.5,189 20.5,189 23.5,189 26.5,189 65.5,189 68.5,189 71.5,189 74.5,189 77.5,189 80.5,189 83.5,189 86.5,189 89.5,189 92.5,189 95.5,189 98.5,189 101.5,189 104.5,189 107.5,189 116.5,189 119.5,189 122.5,189 125.5,189 140.5,189 143.5,189 155.5,189 161.5,189 173.5,189 176.5,189 179.5,189 182.5,189 185.5,189 188.5,189 191.5,189 194.5,189 197.5,189 200.5,189 203.5,189 209.5,189 212.5,189 215.5,189 218.5,189 221.5,189 224.5,189 227.5,189 233.5,189 236.5,189 239.5,189 242.5,189 245.5,189 248.5,189 251.5,189 254.5,189 257.5,189 260.5,189 263.5,189 269.5,189 272.5,189 275.5,189 278.5,189 281.5,189 284.5,189 287.5,189 290.5,189 -2,192 1,192 4,192 7,192 10,192 13,192 16,192 19,192 22,192 25,192 28,192 64,192 67,192 70,192 73,192 76,192 79,192 82,192 85,192 88,192 91,192 94,192 97,192 100,192 103,192 106,192 109,192 112,192 121,192 133,192 244,192 247,192 250,192 253,192 256,192 259,192 265,192 268,192 271,192 274,192 277,192 280,192 283,192 286,192 289,192 292,192 -3.5,195 -0.5,195 2.5,195 5.5,195 8.5,195 11.5,195 14.5,195 17.5,195 20.5,195 23.5,195 26.5,195 65.5,195 68.5,195 71.5,195 74.5,195 77.5,195 80.5,195 83.5,195 86.5,195 89.5,195 92.5,195 95.5,195 98.5,195 101.5,195 104.5,195 107.5,195 110.5,195 113.5,195 122.5,195 125.5,195 230.5,195 233.5,195 236.5,195 239.5,195 242.5,195 245.5,195 248.5,195 251.5,195 254.5,195 257.5,195 260.5,195 263.5,195 266.5,195 269.5,195 272.5,195 275.5,195 278.5,195 281.5,195 284.5,195 287.5,195 290.5,195 -2,198 1,198 4,198 7,198 10,198 13,198 16,198 19,198 22,198 25,198 28,198 64,198 67,198 70,198 73,198 76,198 79,198 82,198 85,198 88,198 91,198 94,198 97,198 100,198 103,198 106,198 109,198 112,198 115,198 148,198 151,198 154,198 166,198 169,198 172,198 175,198 178,198 181,198 184,198 187,198 190,198 193,198 196,198 199,198 202,198 205,198 208,198 211,198 214,198 217,198 220,198 223,198 226,198 229,198 232,198 235,198 238,198 241,198 244,198 247,198 250,198 253,198 256,198 259,198 262,198 265,198 268,198 271,198 274,198 277,198 280,198 283,198 286,198 289,198 292,198 -3.5,201 -0.5,201 2.5,201 5.5,201 8.5,201 11.5,201 14.5,201 17.5,201 20.5,201 23.5,201 26.5,201 65.5,201 68.5,201 71.5,201 74.5,201 77.5,201 80.5,201 83.5,201 86.5,201 89.5,201 92.5,201 95.5,201 98.5,201 101.5,201 104.5,201 107.5,201 110.5,201 113.5,201 116.5,201 119.5,201 155.5,201 158.5,201 161.5,201 173.5,201 176.5,201 179.5,201 182.5,201 185.5,201 188.5,201 191.5,201 194.5,201 197.5,201 200.5,201 203.5,201 206.5,201 209.5,201 212.5,201 215.5,201 218.5,201 221.5,201 224.5,201 227.5,201 230.5,201 233.5,201 236.5,201 239.5,201 242.5,201 245.5,201 248.5,201 251.5,201 254.5,201 257.5,201 260.5,201 263.5,201 266.5,201 269.5,201 272.5,201 275.5,201 278.5,201 281.5,201 284.5,201 287.5,201 290.5,201 -2,204 1,204 4,204 7,204 10,204 13,204 16,204 19,204 22,204 25,204 28,204 64,204 67,204 70,204 73,204 76,204 79,204 82,204 85,204 88,204 91,204 94,204 97,204 100,204 103,204 106,204 109,204 112,204 115,204 121,204 148,204 151,204 154,204 166,204 172,204 175,204 178,204 181,204 184,204 187,204 190,204 193,204 196,204 199,204 202,204 205,204 208,204 211,204 214,204 217,204 220,204 223,204 226,204 229,204 232,204 235,204 238,204 241,204 247,204 250,204 253,204 256,204 259,204 262,204 265,204 268,204 271,204 274,204 277,204 280,204 283,204 286,204 289,204 292,204 -3.5,207 -0.5,207 2.5,207 5.5,207 8.5,207 11.5,207 14.5,207 17.5,207 20.5,207 23.5,207 26.5,207 29.5,207 62.5,207 65.5,207 68.5,207 71.5,207 74.5,207 77.5,207 80.5,207 83.5,207 86.5,207 89.5,207 92.5,207 95.5,207 98.5,207 101.5,207 104.5,207 107.5,207 110.5,207 113.5,207 116.5,207 119.5,207 155.5,207 158.5,207 161.5,207 173.5,207 176.5,207 179.5,207 182.5,207 185.5,207 188.5,207 191.5,207 194.5,207 197.5,207 200.5,207 203.5,207 206.5,207 209.5,207 212.5,207 215.5,207 218.5,207 221.5,207 224.5,207 227.5,207 245.5,207 248.5,207 251.5,207 254.5,207 257.5,207 260.5,207 263.5,207 266.5,207 269.5,207 272.5,207 275.5,207 278.5,207 281.5,207 284.5,207 287.5,207 290.5,207 -2,210 1,210 4,210 7,210 10,210 13,210 16,210 19,210 22,210 25,210 28,210 31,210 34,210 37,210 40,210 43,210 46,210 49,210 52,210 55,210 58,210 61,210 64,210 67,210 70,210 73,210 76,210 79,210 82,210 85,210 88,210 91,210 94,210 97,210 100,210 103,210 106,210 109,210 112,210 115,210 121,210 148,210 151,210 154,210 169,210 172,210 175,210 178,210 181,210 184,210 187,210 190,210 193,210 196,210 199,210 202,210 205,210 208,210 211,210 214,210 217,210 220,210 223,210 226,210 229,210 232,210 235,210 238,210 241,210 247,210 250,210 253,210 256,210 259,210 262,210 265,210 268,210 271,210 274,210 277,210 280,210 283,210 286,210 289,210 292,210 -3.5,213 -0.5,213 2.5,213 5.5,213 8.5,213 11.5,213 14.5,213 17.5,213 20.5,213 23.5,213 26.5,213 29.5,213 32.5,213 35.5,213 38.5,213 41.5,213 44.5,213 47.5,213 50.5,213 53.5,213 56.5,213 59.5,213 62.5,213 65.5,213 68.5,213 71.5,213 74.5,213 77.5,213 80.5,213 83.5,213 86.5,213 89.5,213 92.5,213 95.5,213 98.5,213 101.5,213 104.5,213 107.5,213 110.5,213 113.5,213 116.5,213 119.5,213 197.5,213 200.5,213 203.5,213 206.5,213 209.5,213 212.5,213 215.5,213 218.5,213 221.5,213 224.5,213 227.5,213 230.5,213 233.5,213 236.5,213 239.5,213 242.5,213 245.5,213 248.5,213 251.5,213 254.5,213 257.5,213 260.5,213 263.5,213 266.5,213 269.5,213 272.5,213 275.5,213 278.5,213 281.5,213 284.5,213 287.5,213 290.5,213 4,216 7,216 10,216 13,216 16,216 19,216 22,216 25,216 28,216 31,216 34,216 37,216 40,216 43,216 46,216 49,216 52,216 55,216 58,216 61,216 64,216 67,216 70,216 73,216 76,216 79,216 82,216 85,216 94,216 97,216 100,216 103,216 106,216 109,216 112,216 115,216 142,216 175,216 178,216 181,216 184,216 187,216 190,216 193,216 196,216 205,216 208,216 211,216 214,216 217,216 220,216 223,216 226,216 229,216 232,216 235,216 238,216 241,216 244,216 247,216 250,216 253,216 256,216 259,216 262,216 265,216 268,216 271,216 274,216 277,216 280,216 283,216 286,216 -3.5,219 5.5,219 8.5,219 11.5,219 14.5,219 17.5,219 20.5,219 23.5,219 26.5,219 29.5,219 32.5,219 35.5,219 38.5,219 41.5,219 44.5,219 47.5,219 50.5,219 53.5,219 56.5,219 59.5,219 62.5,219 65.5,219 68.5,219 71.5,219 74.5,219 77.5,219 80.5,219 83.5,219 86.5,219 95.5,219 98.5,219 101.5,219 104.5,219 107.5,219 110.5,219 113.5,219 116.5,219 119.5,219 122.5,219 125.5,219 128.5,219 131.5,219 134.5,219 137.5,219 140.5,219 143.5,219 146.5,219 149.5,219 152.5,219 155.5,219 158.5,219 161.5,219 164.5,219 167.5,219 170.5,219 173.5,219 176.5,219 179.5,219 182.5,219 185.5,219 188.5,219 191.5,219 194.5,219 203.5,219 206.5,219 209.5,219 212.5,219 215.5,219 218.5,219 221.5,219 224.5,219 227.5,219 230.5,219 233.5,219 236.5,219 239.5,219 242.5,219 245.5,219 248.5,219 251.5,219 254.5,219 257.5,219 260.5,219 263.5,219 266.5,219 269.5,219 272.5,219 275.5,219 278.5,219 281.5,219 284.5,219